# EAGLE board Main (EAGLE 8.6.1)
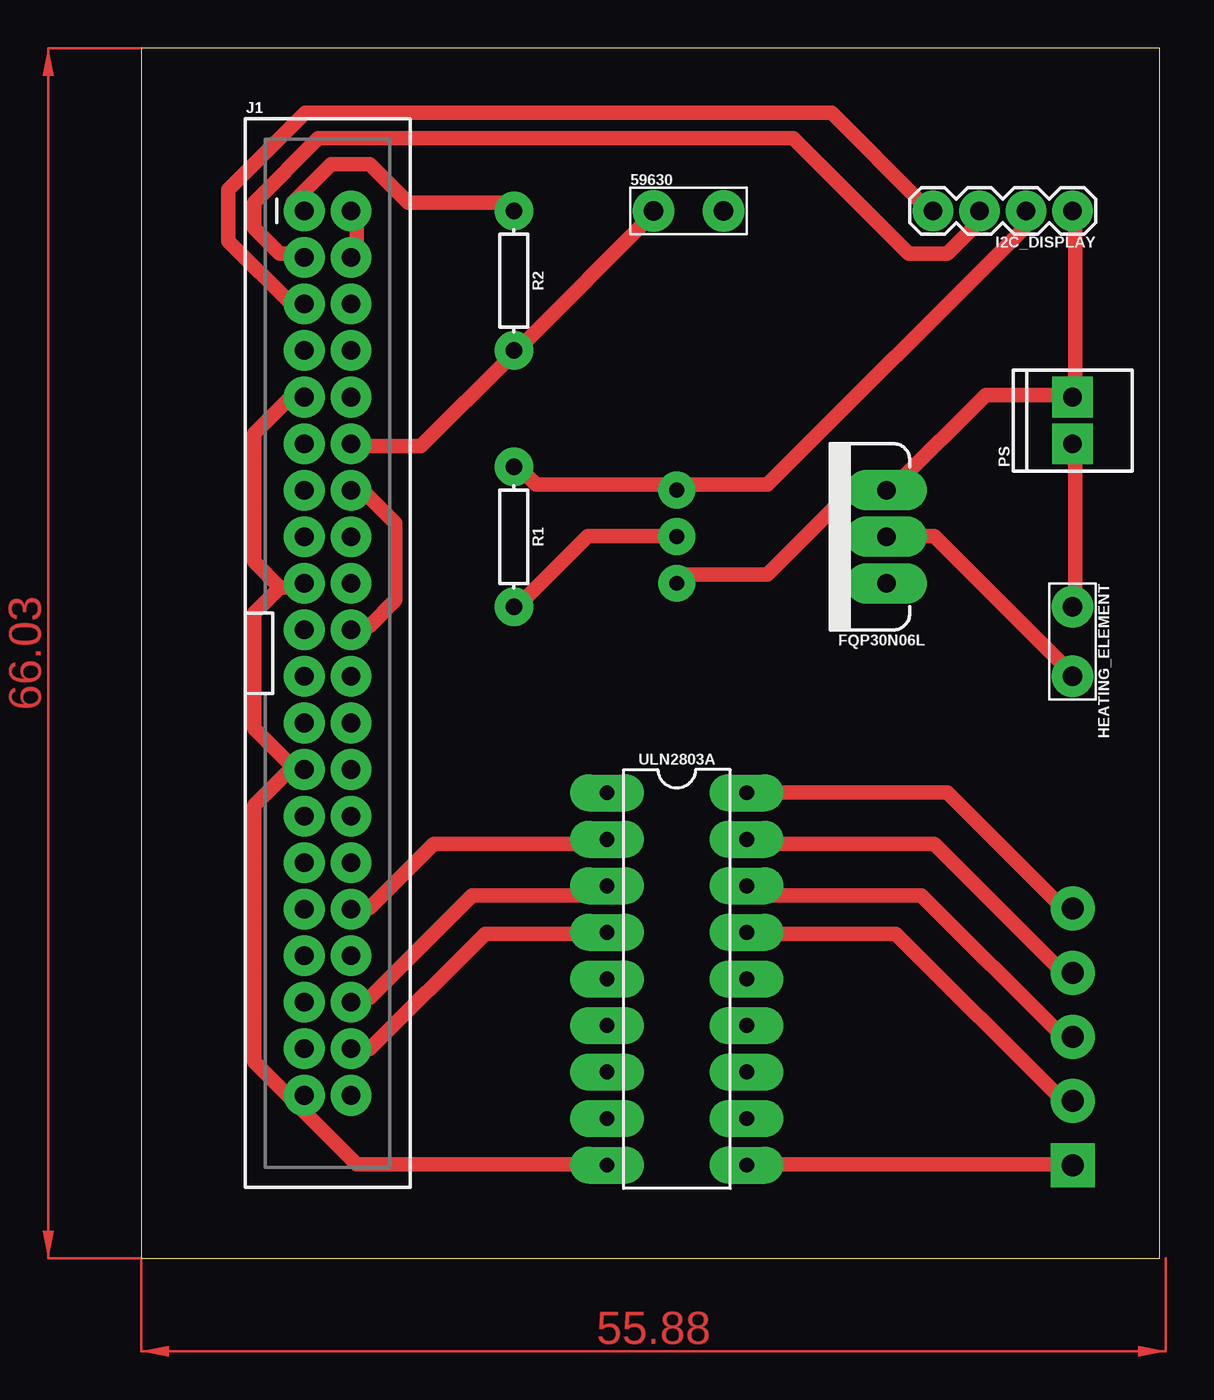
[diagram p0: board, top side]
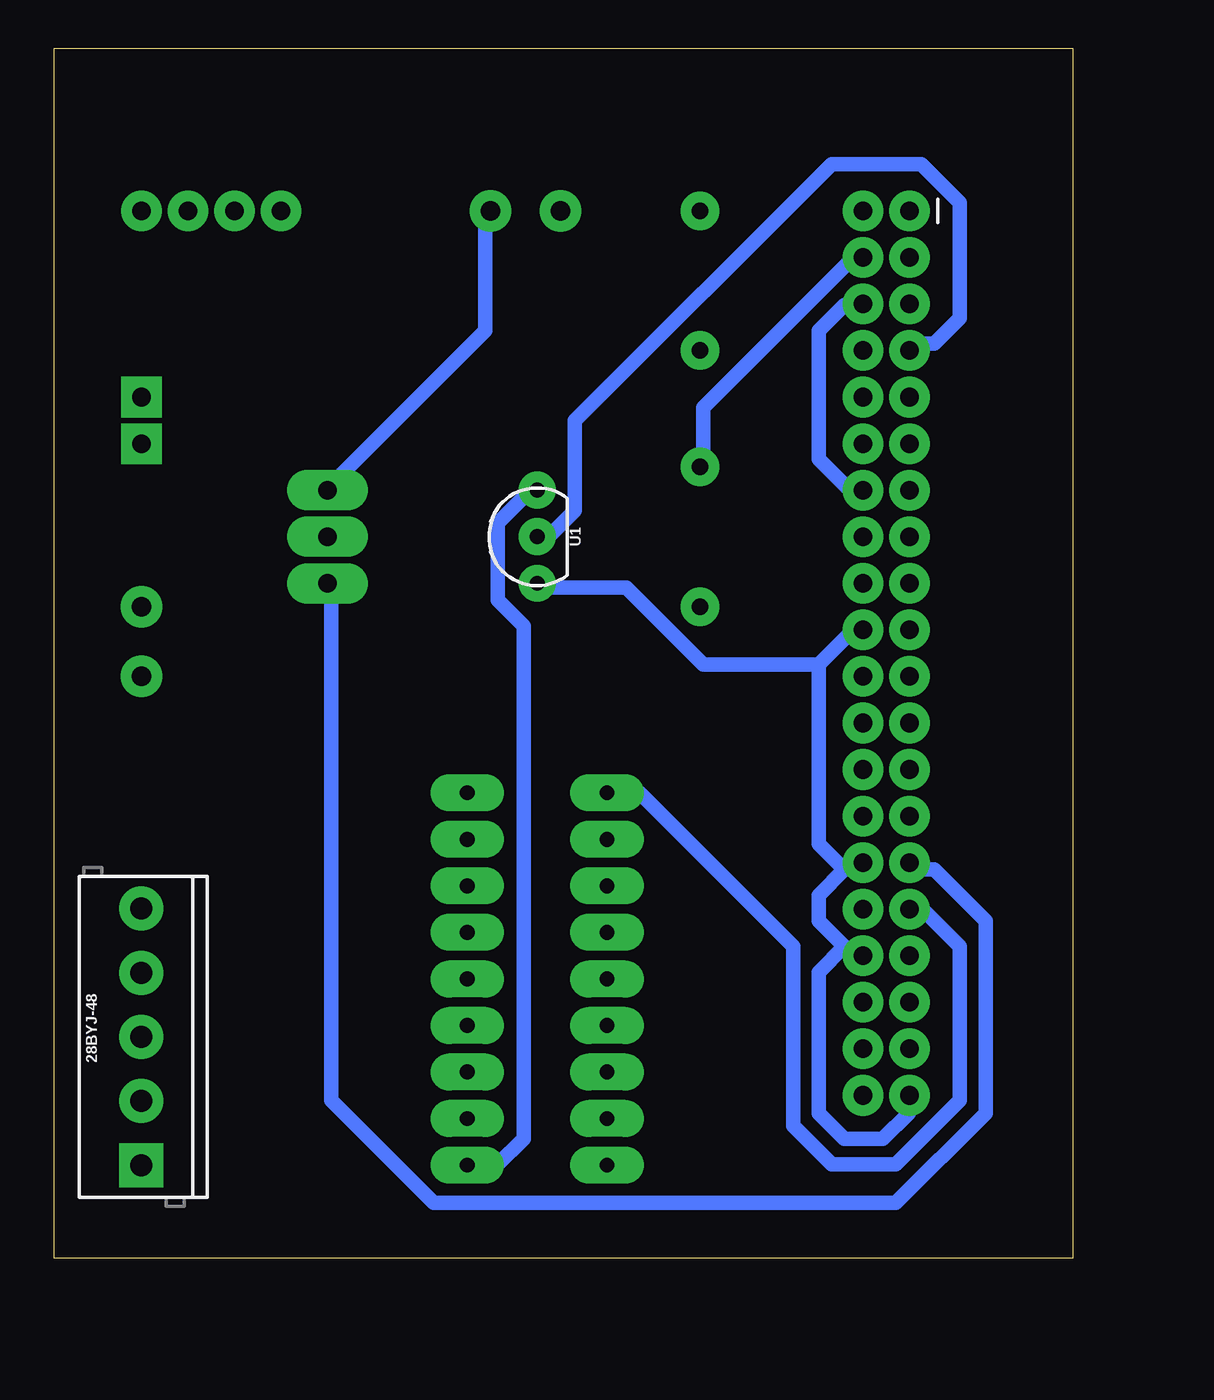
[diagram p1: board, bottom side, seen from below]

Size 55.55 x 66.03 mm. Coordinates in mm from the lower left corner, seen from the top.
Outline: 0,0 55.55,0 55.55,66.03 0,66.03 0,0
Copper layers (1*16): Top 0.035mm / dielectric 1.5mm / Bottom 0.035mm
Design rules "default *": minimum track width 0.8mm, minimum drill 0.8mm, track to track 0.6mm, track to pad 0.6mm, pad to pad 0.4mm, via to via 0.6mm, smd to smd 6mil, copper to edge 40mil, drill to drill 6mil, minimum pad ring 0.6mm, minimum via ring 0.6mm, stop-mask expansion 4mil, vias tented up to drill 0mil, thermal gap 10mil

## Footprints (pad centres in the part's own frame; a part is rotated, then mirrored left to right if it is on the bottom)
SCREWTERMINAL-3.5MM-5 = drill 1.2 pad 2.032 square: 1 0,0 | drill 1.2 pad 2.032: 2 3.5,0; 3 7,0; 4 10.5,0; 5 14,0
1X02_BIG = drill 1.067: P$1 0,0; P$2 3.81,0
TO220V = drill 1.016 long: 1 -2.54,0; 2 0,0; 3 2.54,0
1X04 = drill 1.016 pad 1.88: 1 0,0; 2 2.54,0; 3 5.08,0; 4 7.62,0
2X20_SHROUDED = drill 1.016 pad 1.88: 1 -1.27,24.13; 2 1.27,24.13; 3 -1.27,21.59; 4 1.27,21.59; 5 -1.27,19.05; 6 1.27,19.05; 7 -1.27,16.51; 8 1.27,16.51; 9 -1.27,13.97; 10 1.27,13.97; 11 -1.27,11.43; 12 1.27,11.43; 13 -1.27,8.89; 14 1.27,8.89; 15 -1.27,6.35; 16 1.27,6.35; 17 -1.27,3.81; 18 1.27,3.81; 19 -1.27,1.27; 20 1.27,1.27; 21 -1.27,-1.27; 22 1.27,-1.27; 23 -1.27,-3.81; 24 1.27,-3.81; 25 -1.27,-6.35; 26 1.27,-6.35; 27 -1.27,-8.89; 28 1.27,-8.89; 29 -1.27,-11.43; 30 1.27,-11.43; 31 -1.27,-13.97; 32 1.27,-13.97; 33 -1.27,-16.51; 34 1.27,-16.51; 35 -1.27,-19.05; 36 1.27,-19.05; 37 -1.27,-21.59; 38 1.27,-21.59; 39 -1.27,-24.13; 40 1.27,-24.13
1X02_2.54_SCREWTERM = drill 1.016 square: P1 2.54,0; P2 0,0
AXIAL-0.3 = drill 0.9 pad 1.88: P$1 -3.81,0; P$2 3.81,0
TO-92-AMMO = drill 0.813 pad 1.88: 1 -2.54,0; 2 0,0; 3 2.54,0
DIL18 = drill 0.813 long: 1 -10.16,-3.81; 2 -7.62,-3.81; 3 -5.08,-3.81; 4 -2.54,-3.81; 5 0,-3.81; 6 2.54,-3.81; 7 5.08,-3.81; 8 7.62,-3.81; 9 10.16,-3.81; 10 10.16,3.81; 11 7.62,3.81; 12 5.08,3.81; 13 2.54,3.81; 14 0,3.81; 15 -2.54,3.81; 16 -5.08,3.81; 17 -7.62,3.81; 18 -10.16,3.81

## Placement (x,y rotation side)
28BYJ-48  [SCREWTERMINAL-3.5MM-5]  50.8,5.08 90 bottom
59630  [1X02_BIG]  27.94,57.15 0 top
FQP30N06L  60V/32A/35mΩ  [TO220V]  40.64,39.37 90 top
HEATING_ELEMENT  [1X02_BIG]  50.8,35.56 270 top
I2C_DISPLAY  [1X04]  50.8,57.15 180 top
J1  RASPBERRYPI-40-PIN-GPIO_PTH  [2X20_SHROUDED]  10.16,33.02 0 top
PS  Vin  [1X02_2.54_SCREWTERM]  50.8,44.45 90 top
R1  4K7  [AXIAL-0.3]  20.32,39.37 270 top
R2  10k  [AXIAL-0.3]  20.32,53.34 270 top
U1  DS18B20  [TO-92-AMMO]  29.21,39.37 90 bottom
ULN2803A  [DIL18]  29.21,15.24 270 top

## Library data of the parts
28BYJ-48 = SparkFun-Connectors; PROD_ID: Combine 8288+8399; SPICEPREFIX: X
59630 HEATING_ELEMENT PS = SparkFun-Connectors
FQP30N06L = SparkFun-DiscreteSemi; PROD_ID: TRANS-10060
I2C_DISPLAY = SparkFun-Connectors; SPICEPREFIX: E
J1 = SparkFun-Connectors; PROD_ID: CONN-12263; SF_ID: PRT-13054
R1 = SparkFun-Resistors
R2 = SparkFun-Resistors; PROD_ID: RES-12183
U1 = SparkFun-Sensors; SPICEPREFIX: U; STORE_ID: SEN-00245
ULN2803A = SparkFun-IC-Special-Function

## Nets
3V3: J1.1 R2.P$1
5V: 28BYJ-48.1 I2C_DISPLAY.2 J1.2 J1.4 R1.P$1 U1.3 ULN2803A.10
12V: HEATING_ELEMENT.P$1 PS.P2
DQ: J1.7 R1.P$2 U1.2
GND: 59630.P$2 FQP30N06L.3 I2C_DISPLAY.1 J1.6 J1.9 J1.14 J1.17 J1.20 J1.25 J1.30 J1.34 J1.39 PS.P1 U1.1 ULN2803A.9
N$2: J1.31 ULN2803A.1
N$3: FQP30N06L.1 J1.29
N$4: J1.36 ULN2803A.3
N$5: J1.38 ULN2803A.4
N$8: FQP30N06L.2 HEATING_ELEMENT.P$2
N$10: J1.32 ULN2803A.2
N$13: 28BYJ-48.5 ULN2803A.18
N$14: 28BYJ-48.4 ULN2803A.17
N$15: 28BYJ-48.3 ULN2803A.16
N$16: 28BYJ-48.2 ULN2803A.15
SCL: I2C_DISPLAY.4 J1.5
SDA: I2C_DISPLAY.3 J1.3
WS: 59630.P$1 J1.12 R2.P$2

## Tracks (layer width: path | path; a pad name or v marks a point on that pad's centre or on a via)
3V3
  Top 0.8: R2.P$1 20.15,57.61 14.55,57.61 12.45,59.71 10.35,59.71 8.25,57.61 J1.1
5V
  Top 0.8: ULN2803A.10 33.45,5.11 50.25,5.11 28BYJ-48.1 | J1.4 11.75,54.81 11.75,56.91 J1.2 | R1.P$1 20.85,42.91 21.55,42.21 28.55,42.21 U1.3 29.25,42.21 34.15,42.21 48.15,56.21 48.15,56.91 I2C_DISPLAY.2
  Bottom 0.8: J1.4 11.75,54.81 20.15,46.41 20.15,43.61 R1.P$1 | ULN2803A.10 32.75,5.11 31.35,5.11 29.95,6.51 29.95,34.51 31.35,35.91 31.35,40.11 29.25,42.21 U1.3
12V
  Top 0.8: PS.P2 50.95,44.31 50.95,35.91 HEATING_ELEMENT.P$1
DQ
  Top 0.8: U1.2 28.55,39.41 24.35,39.41 20.85,35.91 R1.P$2
  Bottom 0.8: J1.7 8.25,49.91 7.55,49.91 6.15,51.31 6.15,57.61 8.25,59.71 13.15,59.71 27.15,45.71 27.15,40.81 28.55,39.41 U1.2
GND
  Top 0.8: I2C_DISPLAY.1 50.95,56.91 50.95,47.11 PS.P1 50.25,47.11 46.05,47.11 41.15,42.21 FQP30N06L.3 40.45,41.51 38.35,41.51 34.15,37.31 29.25,37.31 U1.1 | 8.25,26.81 6.15,28.91 6.15,35.21 7.55,36.61 | 7.55,36.61 8.25,36.61 J1.17 | 7.55,36.61 6.15,38.01 6.15,45.01 8.25,47.11 J1.9 | 8.25,8.61 11.75,5.11 25.05,5.11 ULN2803A.9 | J1.20 11.75,34.51 12.45,34.51 13.85,35.91 13.85,40.11 11.75,42.21 J1.14 | 8.25,26.81 6.15,24.71 6.15,10.71 8.25,8.61 | 8.25,26.81 J1.25 | 8.25,8.61 J1.39
  Bottom 0.8: 59630.P$2 32.05,56.91 32.05,50.61 40.45,42.21 FQP30N06L.3 | 12.45,17.01 13.85,18.41 13.85,19.81 12.45,21.21 | 12.45,17.01 11.75,16.31 J1.34 12.45,17.01 | 12.45,21.21 11.75,21.91 J1.30 12.45,21.21 | J1.6 11.75,52.01 12.45,52.01 13.85,50.61 13.85,43.61 11.75,41.51 J1.14 | 12.45,21.21 13.85,22.61 13.85,32.41 | 13.85,32.41 11.75,34.51 J1.20 | 12.45,17.01 13.85,15.61 13.85,7.91 12.45,6.51 10.35,6.51 8.95,7.91 8.95,8.61 J1.39 | 13.85,32.41 20.15,32.41 24.35,36.61 28.55,36.61 U1.1
N$2
  Bottom 0.8: ULN2803A.1 25.05,25.41 23.65,25.41 15.25,17.01 15.25,7.21 13.15,5.11 9.65,5.11 6.15,8.61 6.15,17.01 8.25,19.11 J1.31
N$3
  Bottom 0.8: J1.29 8.25,21.21 7.55,21.21 4.75,18.41 4.75,7.91 9.65,3.01 34.85,3.01 40.45,8.61 40.45,36.61 FQP30N06L.1
N$4
  Top 0.8: ULN2803A.3 25.05,19.81 18.05,19.81 12.45,14.21 11.75,14.21 J1.36
N$5
  Top 0.8: ULN2803A.4 25.05,17.71 18.75,17.71 12.45,11.41 11.75,11.41 J1.38
N$8
  Top 0.8: FQP30N06L.2 41.15,39.41 43.25,39.41 50.25,32.41 HEATING_ELEMENT.P$2
N$10
  Top 0.8: ULN2803A.2 25.05,22.61 15.95,22.61 12.45,19.11 11.75,19.11 J1.32
N$13
  Top 0.8: ULN2803A.18 33.45,25.41 43.95,25.41 50.25,19.11 28BYJ-48.5
N$14
  Top 0.8: ULN2803A.17 33.45,22.61 43.25,22.61 50.25,15.61 28BYJ-48.4
N$15
  Top 0.8: ULN2803A.16 33.45,19.81 42.55,19.81 50.25,12.11 28BYJ-48.3
N$16
  Top 0.8: ULN2803A.15 33.45,17.71 41.15,17.71 50.25,8.61 28BYJ-48.2
SCL
  Top 0.8: J1.5 8.25,52.01 4.75,55.51 4.75,58.31 8.95,62.51 37.65,62.51 42.55,57.61 I2C_DISPLAY.4
SDA
  Top 0.8: J1.3 8.25,54.81 7.55,54.81 6.15,56.21 6.15,57.61 9.65,61.11 35.55,61.11 41.85,54.81 43.95,54.81 46.05,56.91 I2C_DISPLAY.3
WS
  Top 0.8: 59630.P$1 27.85,56.91 20.85,49.91 R2.P$2 20.15,49.21 15.25,44.31 11.75,44.31 J1.12
(copper drawn outside any net)
  shapes: Top area x2